# Altium PCB urbanturbine.PcbDoc
Units mil, origin at the board's own origin, x right, y up, seen from the top; angles counter-clockwise.
Board outline 2235 x 2080 mil, 2 copper layers (Top Layer, Bottom Layer); 33 components, 39 nets, 137 pads, 9 vias.
Unrouted connection lines stored in the file: 19.
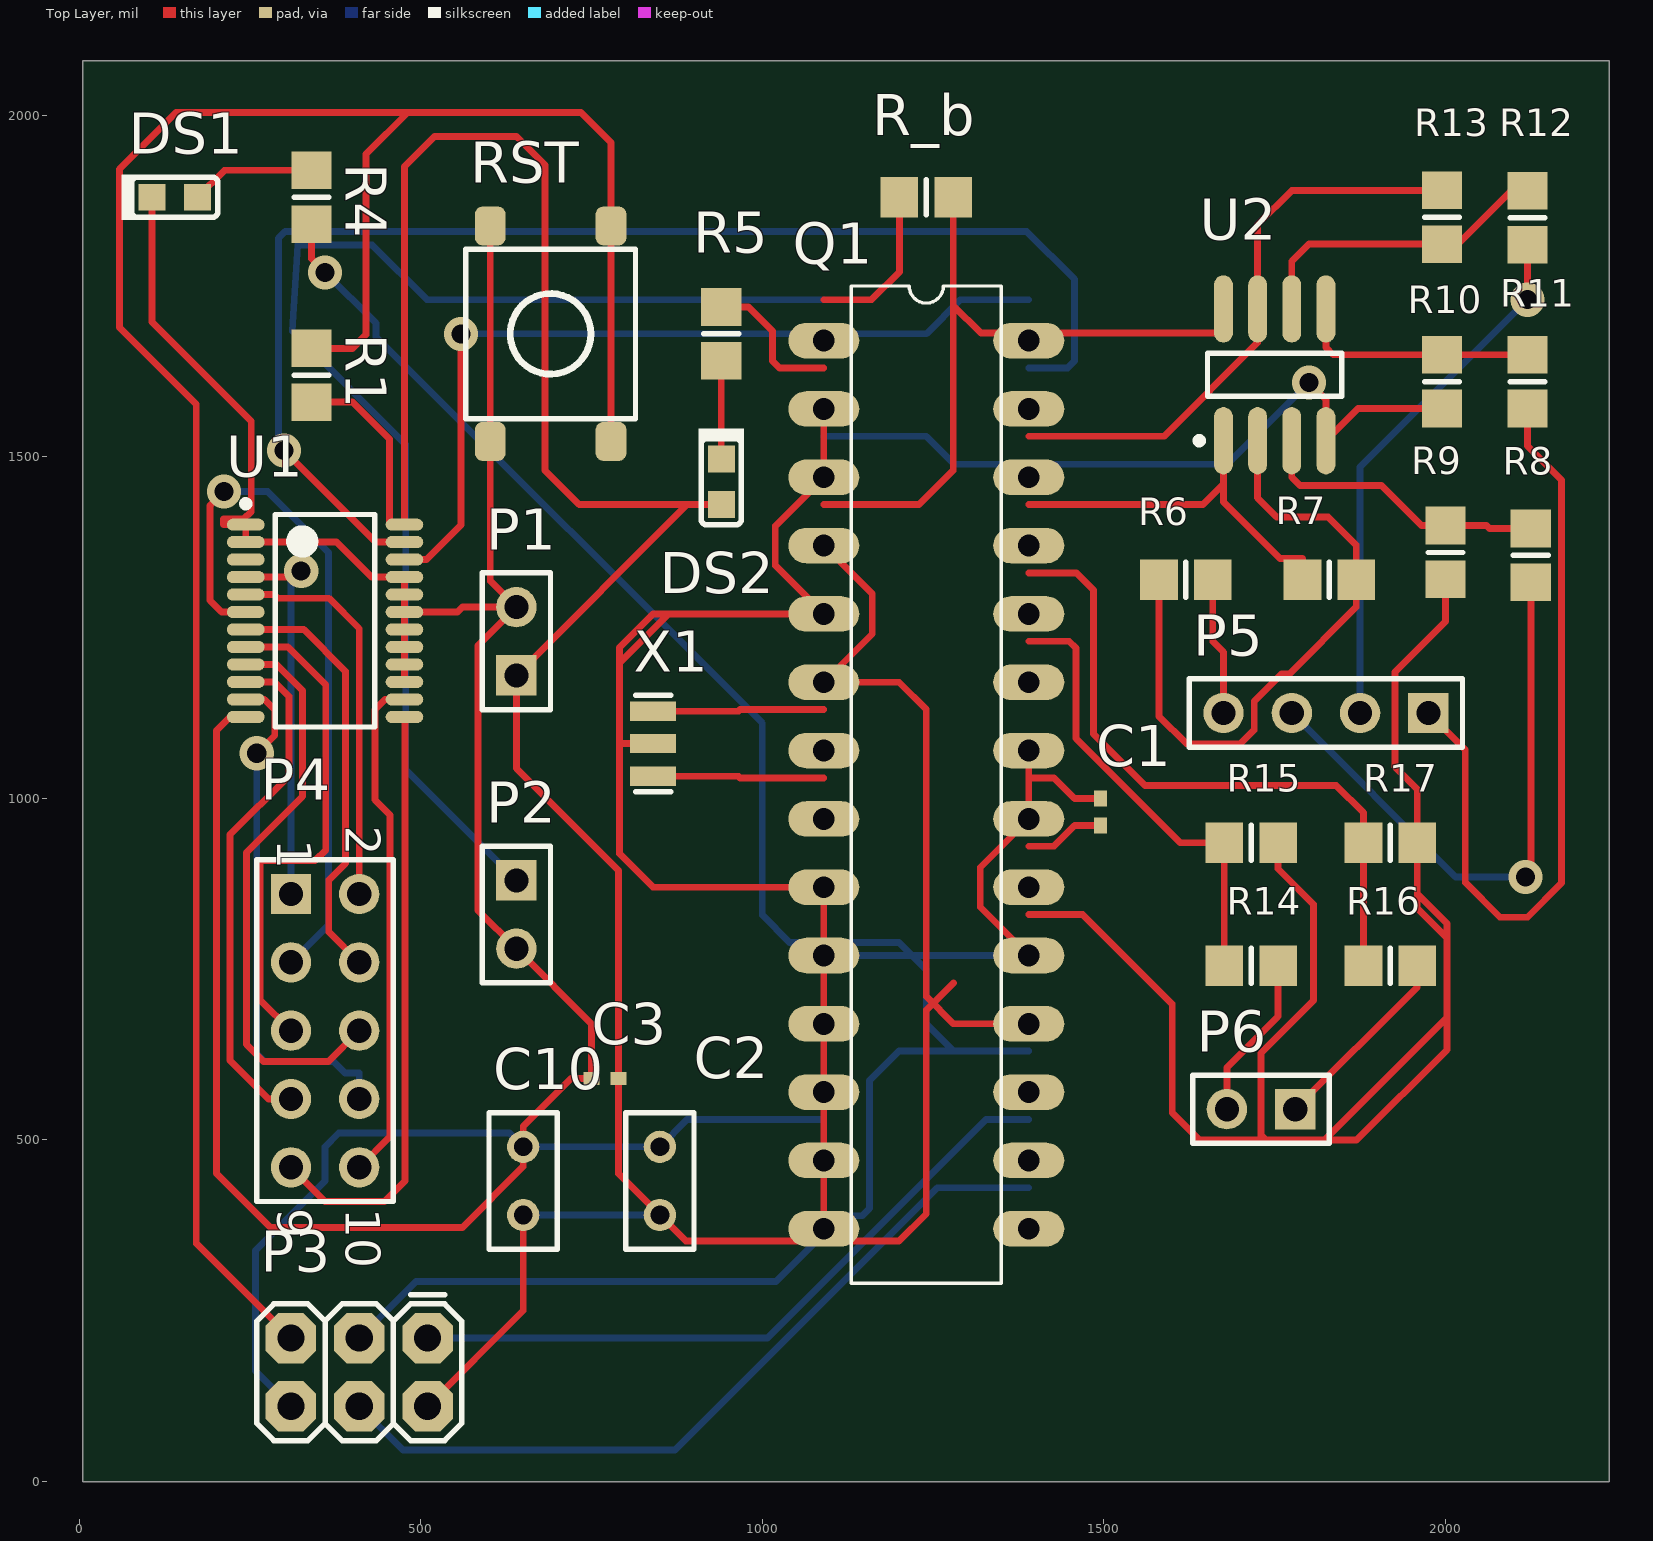
[diagram p0: Top Layer view]
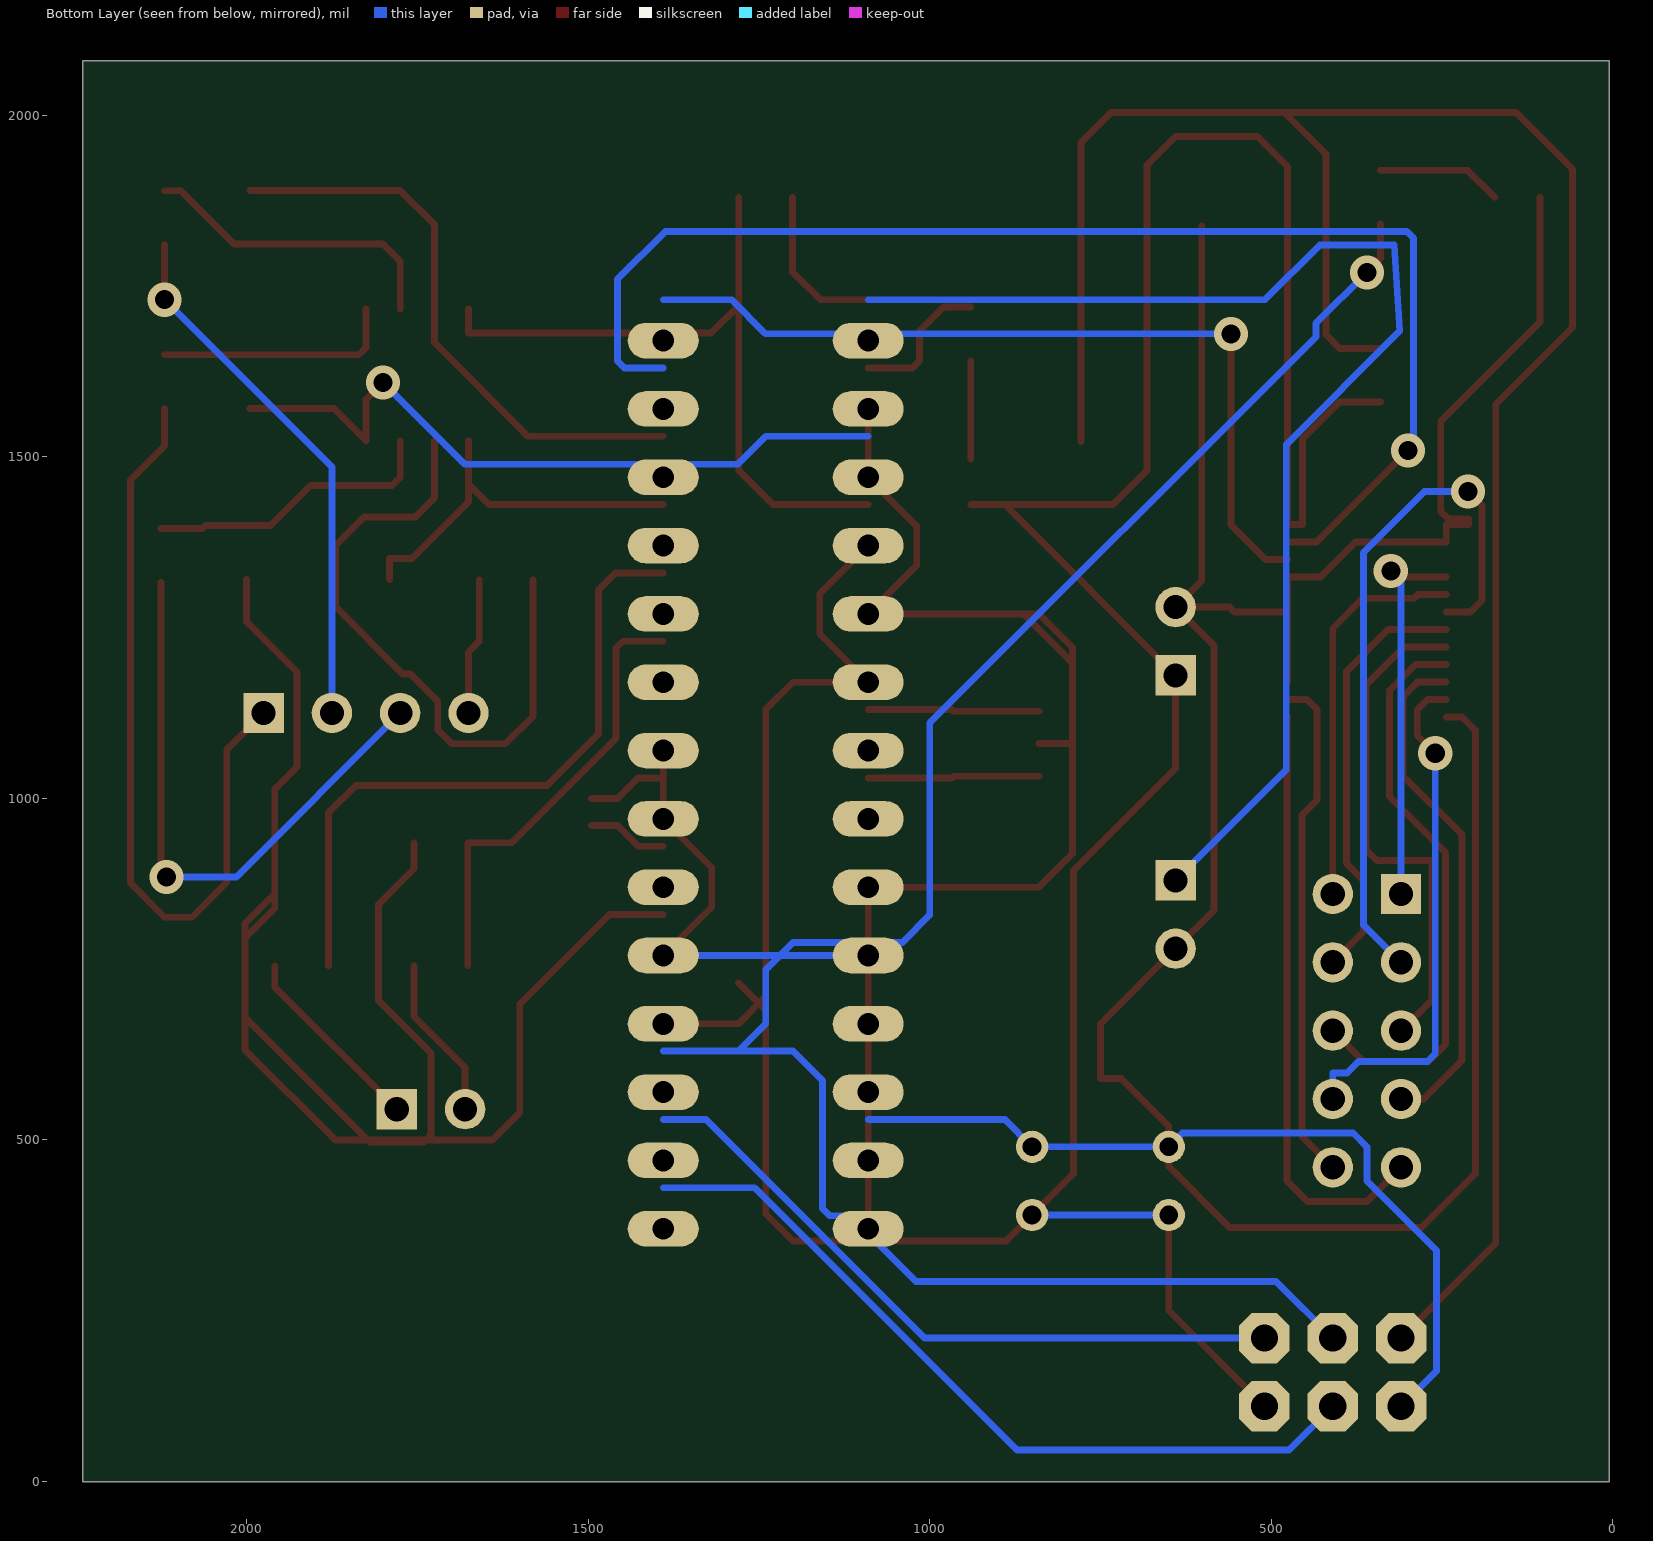
[diagram p1: Bottom Layer view, seen from below]

## Layer stack, top to bottom
Top Solder: solder mask 0.4, Solder Resist, Dk 3.5
Top Layer: signal copper 1.4
Dielectric 1: dielectric 12.6, FR-4, Dk 4.8
Bottom Layer: signal copper 1.4
Bottom Solder: solder mask 0.4, Solder Resist, Dk 3.5

## Board outline
5,0 5,1715 5,2080 2240,2080 2240,0

## Design rules (kind name [scope] priority, off if disabled: settings)
Clearance [All] p1: gap=10 ignorepadtopadclearanceinfootprint=FALSE except(0: Arc-Hole Track-Hole SMDPad-Hole THPad-Hole Via-Hole Fill-Hole Poly-Hole Region-Hole Text-Hole)
PolygonConnect [All] p1: connectstyle=Relief reliefconductorwidth=10 reliefentries=4 polygonreliefangle="90 Angle" airgapwidth=10
RoutingVias [All] p1: holewidth=28 width=50 viastyle="Through Hole" minholewidth=28 minwidth=50 maxholewidth=28 maxwidth=50
SolderMaskExpansion [All] p1: expansion=4
Width [All] p1: maxlimit=10 minlimit=10 preferedwidth=10
30 further rules are at their usual default settings.

## Classes and differential pairs
component class urbanturbine: C1 C2 C3 C10 DS1 DS2 P1 P2 P3 P4 Q1 R1 R4 R5 R_b RST U1 X1
component class sensors: P5 P6 R6 R7 R8 R9 R10 R11 R12 R13 R14 R15 R16 R17 U2

## Components (designator, comment, footprint, x,y, rotation, side; value= is the part's Value field where it differs from the comment)
C1 "C1005X7R1H104K050BB" 0402 1495,980 r270 top value=0.1uF
C2 "Cap Pol1" RAD-0.1 850,440 r90 top value=100pF
C3 "C1005X7R1H104K050BB" 0402 769.68,590 r0 top value=0.1uF
C10 "Cap Pol1" RAD-0.1 650,440 r90 top value=100pF
DS1 "LTST-C191KRKT" KING-LED0603-25-RED_V 140,1880 r0 top
DS2 "LTST-C191KGKT" KING-LED0603-25-GREEN_V 940,1463.46 r270 top
P1 "" HDR1X2 640,1180 r90 top
P2 "" HDR1X2 640,880 r270 top
P3 "M20-9980346" 2X3 510,210 r180 top
P4 "Header 5X2" HDR2X5 310,860 r270 top
P5 "" HDR1X4 1975,1125 r180 top
P6 "" HDR1X2 1780,545 r180 top
Q1 "ATMEGA328P-MU" *DIL28 1240,1020 r0 top
R1 "Res1" 6-0805_M 340,1619.37 r90 top value=1K
R4 "Res1" 6-0805_M 340,1880 r90 top value=1K
R5 "RC0603JR-071KL" 6-0805_M 940,1680 r90 top value=1k
R6 "10k" 6-0805_M 1620,1320 r0 top value="100k Ohm"
R7 "100k" 6-0805_M 1830,1320 r0 top value="100k Ohm"
R8 "10k" 6-0805_M 2125,1355.63 r270 top value="100k Ohm"
R9 "100k" 6-0805_M 2000,1360 r270 top value="100k Ohm"
R10 "100k" 6-0805_M 1995,1610 r90 top value="100k Ohm"
R11 "10k" 6-0805_M 2120,1610 r270 top value="100k Ohm"
R12 "10k" 6-0805_M 2120,1850 r90 top value="100k Ohm"
R13 "100k" 6-0805_M 1995,1850.63 r90 top value="100k Ohm"
R14 "90k" 6-0805_M 1715.63,755 r0 top value="10k Ohm"
R15 "10k" 6-0805_M 1715.63,935 r180 top value="22k Ohm"
R16 "90k" 6-0805_M 1919.37,755 r0 top value="10k Ohm"
R17 "10k" 6-0805_M 1919.37,935 r180 top value="22k Ohm"
R_b "Res1" 6-0805_M 1240,1880 r180 top value=1K
RST "PTS645SH50SMTR92 LFS" "TACTILE SWITCH SMD" 690,1680 r90 top
U1 "TCA9548A" TCA9548A 360,1260 r0 top
U2 "NCS2333" SO8_M 1750,1620 r90 top
X1 "16MHz" RESONATOR-SMD 840,1080 r270 top

## Footprints (in the part's own frame and the unit in brackets; to place one, negate y for a bottom-side part, rotate by r counter-clockwise, add the part's x,y. Pads: shape width x height; smd on the part's side, far side on the other; paste and mask are expansions set on the pad)
2X3 [mil] "2X3"
  oct 74x74 hole 40: 1(0,0) 2(0,100) 3(100,0) 4(100,100) 5(200,0) 6(200,100)
  silkscreen extent -50,-63 250,150, body extent -50,-49 250,149, height 335
6-0805_M [mm] "Chip Resistor, Body 2.0x1.2mm, IPC Low Density"
  rect 1.4x1.5 smd: 1(-1,0) 2(1,0)
  silkscreen extent 0,-0.65 0,0.65, body extent -1.07,-0.7 1.07,0.7, height 0.7
0402 [mm] "Chip Capacitor, Body 1.0x0.5mm, IPC High Density"
  rect 0.6x0.5 smd: 1(-0.5,0) 2(0.5,0)
  body extent -0.55,-0.3 0.55,0.3, height 1.3
*DIL28 [mil]
  oval 104x52 hole 32: 1(-150,650) 2(-150,550) 3(-150,450) 4(-150,350) 5(-150,250) 6(-150,150) 7(-150,50) 8(-150,-50) 9(-150,-150) 10(-150,-250) 11(-150,-350) 12(-150,-450) 13(-150,-550) 14(-150,-650) 15(150,-650) 16(150,-550) 17(150,-450) 18(150,-350) 19(150,-250) 20(150,-150) 21(150,-50) 22(150,50) 23(150,150) 24(150,250) 25(150,350) 26(150,450) 27(150,550) 28(150,650)
  silkscreen extent -110,-730 110,730, body extent -315,-730 110,730, height 314
HDR1X2 [mm] "Connector; Header; 2 Position"
  rect 1.5x1.5 hole 0.9: 1(0,0)
  round 1.5 hole 0.9: 2(2.54,0)
  silkscreen extent -1.27,-1.27 3.81,1.27
HDR1X4 [mm] "Connector; Header; 4 Position"
  rect 1.5x1.5 hole 0.9: 1(0,0)
  round 1.5 hole 0.9: 2(2.54,0) 3(5.08,0) 4(7.62,0)
  silkscreen extent -1.27,-1.27 8.89,1.27
HDR2X5 [mm] "Connector; Header; 5x2 Position"
  rect 1.5x1.5 hole 0.9: 1(0,0)
  round 1.5 hole 0.9: 2(0,2.54) 3(2.54,0) 4(2.54,2.54) 5(5.08,0) 6(5.08,2.54) 7(7.62,0) 8(7.62,2.54) 9(10.16,0) 10(10.16,2.54)
  silkscreen extent -1.27,-1.27 11.43,3.81
KING-LED0603-25-GREEN_V [mm] "LED, SMT, Body 1.6 x 0.8 mm, 0.25mm Thickness"
  rect 1x1 smd paste+0 mask+0: 1(0.85,0) 2(-0.85,0)
  silkscreen extent -1.97,-0.85 1.6,0.85, body extent -0.8,-0.4 0.8,0.4, height 0.25
KING-LED0603-25-RED_V [mm] "LED, SMT, Body 1.6 x 0.8 mm, 0.25mm Thickness"
  rect 1x1 smd paste+0 mask+0: 1(0.85,0) 2(-0.85,0)
  silkscreen extent -1.97,-0.85 1.6,0.85, body extent -0.8,-0.4 0.8,0.4, height 0.25
RAD-0.1 [mm] "Radial Cap, Thru-Hole; 2 Leads; 0.1 in Pin Spacing"
  round 1.2 hole 0.7: 1(-1.27,0) 2(1.27,0)
  silkscreen extent -2.54,-1.27 2.54,1.27
RESONATOR-SMD [mil] "RESONATOR-SMD"
  rect 28x67 smd: 1(-47.62,0) 2(-0.38,0) 3(47.62,0)
  silkscreen extent -71,-26 71,26
SO8_M [mm] "SOIC, 8-Leads, Body 4.9x3.9mm, Pitch 1.27mm, IPC Low Density"
  oval 2.5x0.7 smd: 1(-2.45,1.905) 2(-2.45,0.635) 3(-2.45,-0.635) 4(-2.45,-1.905) 5(2.45,-1.905) 6(2.45,-0.635) 7(2.45,0.635) 8(2.45,1.905)
  silkscreen extent -2.57,-2.5 0.8,2.93, body extent -2,-2.5 2,2.5, height 1.75
"TACTILE SWITCH SMD" [mil] "Switch, Through-Hole, 4 Leads, Body 8.5x8.5mm, Row Spacing 9.0mm, Pitch 4.5mm"
  rrect50% 57x45 smd: 1(157.87,-88.58) 2(-157.48,-88.58) 3(157.87,88.19) 4(-157.48,88.19)
  silkscreen extent -124,-124 124,124, body extent -177,-122 177,122, height 177
TCA9548A [mm] "TSOP, 24-Leads, Body 7.80x4.40mm, Pitch 0.65mm, IPC Medium Density"
  oval 1.4x0.45 smd: 1(-2.95,3.575) 2(-2.95,2.925) 3(-2.95,2.275) 4(-2.95,1.625) 5(-2.95,0.975) 6(-2.95,0.325) 7(-2.95,-0.325) 8(-2.95,-0.975) 9(-2.95,-1.625) 10(-2.95,-2.275) 11(-2.95,-2.925) 12(-2.95,-3.575) 13(2.95,-3.575) 14(2.95,-2.925) 15(2.95,-2.275) 16(2.95,-1.625) 17(2.95,-0.975) 18(2.95,-0.325) 19(2.95,0.325) 20(2.95,0.975) 21(2.95,1.625) 22(2.95,2.275) 23(2.95,2.925) 24(2.95,3.575)
  silkscreen extent -3.07,-3.95 1.85,4.47, body extent -3.27,-3.96 3.28,3.93, height 1.2

## Part data
C1 C3: "CAP CER 0.1UF 50V 10% X7R 0402", Capacitance=0.1µF, Manufacturer="TDK Corporation", Operating Temperature="-55°C ~ 125°C", Package / Case="0402 (1005 Metric)", Ratings=-, Supplier Part Number 1=445-5932-1-ND, Temperature Coefficient=X7R, Tolerance=±10%, Voltage - Rated=50V, Applications="General Purpose", Category=Capacitors, ComponentLink1Description=http://product.tdk.com/en/catalog/datasheets/mlcc_commercial_general_en.pdf, ComponentLink1URL=http://product.tdk.com/en/catalog/datasheets/mlcc_commercial_general_en.pdf, Features=-, Height - Seated (Max)=-, Lead Spacing=-, Lead Style=-, Manufacturer Part Number=C1005X7R1H104K050BB, Mounting Type="Surface Mount, MLCC", Packaging="Cut Tape (CT)", Pricing 1="1=0.21, 10=0.14, 100=0.0664, 250=0.05592, 500=0.04684, 1000=0.03845, 5000=0.03251 (CAD)", RoHS="RoHS Compliant", Size / Dimension="0.039\" L x 0.020\" W (1.00mm x 0.50mm)", Stock 1=7100869, Supplier 1=Digi-Key, Thickness (Max)="0.022\" (0.55mm)"
C2 C10: "Polarized Capacitor (Radial)", LatestRevisionDate=17-Jul-2002, LatestRevisionNote="Re-released for DXP Platform.", PackageDescription="Polarized Capacitor (Radial); 2 Leads", PackageReference=RB7.6-15, Published=8-Jun-2000, Publisher="Altium Limited"
DS1: "LED SUPER RED CLR THIN 0603 SMD", Color=Red, Current - Test=20mA, Lens Color=Colorless, Manufacturer="Lite-On Inc.", Millicandela Rating=54mcd, Package / Case="0603 (1608 Metric)", Supplier Part Number 1=160-1447-1-ND, Voltage - Forward (Vf) (Typ)=2V, Category=Optoelectronics, ComponentLink1Description=http://optoelectronics.liteon.com/upload/download/DS22-2000-223/S_110_LTST-C191KRKT.pdf, ComponentLink1URL=http://optoelectronics.liteon.com/upload/download/DS22-2000-223/S_110_LTST-C191KRKT.pdf, Height (Max)=0.55mm, Lens Style/Size="Rectangle with Flat Top, 1.10mm x 0.80mm", Lens Transparency=Clear, Manufacturer Part Number=LTST-C191KRKT, Mounting Type="Surface Mount", Packaging="Cut Tape (CT)", Pricing 1="1=0.42, 10=0.333, 100=0.1812, 250=0.1208, 500=0.10268, 1000=0.07853, 2500=0.07098 (CAD)", RoHS="RoHS Compliant", Size / Dimension="1.60mm L x 0.80mm W", Stock 1=239192, Supplier 1=Digi-Key, Viewing Angle=130°, Wavelength - Dominant=631nm, Wavelength - Peak=639nm
DS2: "LED GREEN CLEAR THIN 0603 SMD", Color=Green, Current - Test=20mA, Lens Color=Colorless, Manufacturer="Lite-On Inc.", Millicandela Rating=35mcd, Package / Case="0603 (1608 Metric)", Supplier Part Number 1=160-1446-6-ND, Voltage - Forward (Vf) (Typ)=2V, Category=Optoelectronics, ComponentLink1Description=http://optoelectronics.liteon.com/upload/download/DS22-2000-228/S_110_LTST-C191KGKT.pdf, ComponentLink1URL=http://optoelectronics.liteon.com/upload/download/DS22-2000-228/S_110_LTST-C191KGKT.pdf, Height (Max)=0.55mm, Lens Style/Size="Rectangle with Flat Top, 1.10mm x 0.80mm", Lens Transparency=Clear, Manufacturer Part Number=LTST-C191KGKT, Mounting Type="Surface Mount", Packaging=Digi-Reel®, Pricing 1="1=0.42, 10=0.333, 100=0.1812, 250=0.1208, 500=0.10268, 1000=0.07853, 2500=0.07098 (CAD)", RoHS="RoHS Compliant", Size / Dimension="1.60mm L x 0.80mm W", Stock 1=186242, Supplier 1=Digi-Key, Viewing Angle=130°, Wavelength - Dominant=571nm, Wavelength - Peak=574nm
P1 P2 P6: library part "Header 2", "Header, 2-Pin", LatestRevisionDate=17-Jul-2002, LatestRevisionNote="Re-released for DXP Platform.", Publisher="Altium Limited"
P3: "DIL VERTICAL PC TAIL PIN HEADER", Color=Black, Manufacturer="Harwin Inc.", Supplier Part Number 1=952-2121-ND, Category="Connectors, Interconnects", ComponentLink1Description=http://cdn.harwin.com/pdfs/M20-998.pdf, ComponentLink1URL=http://cdn.harwin.com/pdfs/M20-998.pdf, Connector Type="Header, Unshrouded, Breakaway", Contact Finish=Tin, Contact Finish Thickness=-, Contact Mating Length="0.240\" (6.10mm)", Contact Type="Male Pin", Fastening Type=-, Features=-, Manufacturer Part Number=M20-9980346, Mounting Type="Through Hole", Number of Positions=6, Number of Positions Loaded=All, Number of Rows=2, Packaging=Bulk, Pitch="0.100\" (2.54mm)", Pricing 1="1=0.32, 10=0.299, 25=0.2552, 50=0.2232, 100=0.2072, 250=0.18336, 500=0.17534, 1000=0.14346, 2500=0.13151 (CAD)", RoHS="RoHS Compliant", Row Spacing="0.100\" (2.54mm)", Stock 1=14297, Supplier 1=Digi-Key, Termination=Solder
P4: "Header, 5-Pin, Dual row", LatestRevisionDate=17-Jul-2002, LatestRevisionNote="Re-released for DXP Platform.", Publisher="Altium Limited"
P5: library part "Header 4", "Header, 4-Pin", LatestRevisionDate=17-Jul-2002, LatestRevisionNote="Re-released for DXP Platform.", Publisher="Altium Limited"
Q1: "IC MCU 8BIT 32KB FLASH 32QFN", Manufacturer=Atmel, Operating Temperature="-40°C ~ 85°C", Package / Case="32-VFQFN Exposed Pad", Supplier Device Package="32-VQFN (5x5)", Supplier Part Number 1=ATMEGA328P-MU-ND, Voltage - Supply (Vcc/Vdd)="1.8 V ~ 5.5 V", Category="Integrated Circuits (ICs)", ComponentLink1Description=http://www.atmel.com/images/atmel-8271-8-bit-avr-microcontroller-atmega48a-48pa-88a-88pa-168a-168pa-328-328p_datasheet_summary.pdf, ComponentLink1URL=http://www.atmel.com/images/atmel-8271-8-bit-avr-microcontroller-atmega48a-48pa-88a-88pa-168a-168pa-328-328p_datasheet_summary.pdf, Connectivity="I²C, SPI, UART/USART", Core Processor=AVR, Core Size=8-Bit, Data Converters="A/D 8x10b", EEPROM Size="1K x 8", Manufacturer Part Number=ATMEGA328P-MU, Number of I/O=23, Oscillator Type=Internal, Packaging=Tray, Peripherals="Brown-out Detect/Reset, POR, PWM, WDT", Pricing 1="1=5.01, 10=4.465, 100=3.6608, 250=3.30364, 500=2.96432, 1000=2.50003 (CAD)", Program Memory Size="32KB (16K x 16)", Program Memory Type=FLASH, RAM Size="2K x 8", RoHS="RoHS Compliant", Speed=20MHz, Stock 1=70195, Supplier 1=Digi-Key
R1 R4 R_b: "Resistor", LatestRevisionDate=17-Jul-2002, LatestRevisionNote="Re-released for DXP Platform.", PackageDescription="Axial Device, Thru-Hole; 2 Leads; 0.3 in Pin Spacing", PackageReference=AXIAL-0.3, Published=8-Jun-2000, Publisher="Altium Limited"
R5: "RES SMD 1K OHM 5% 1/10W 0603", Manufacturer=Yageo, Operating Temperature="-55°C ~ 155°C", Package / Case="0603 (1608 Metric)", Power (Watts)="0.1W, 1/10W", Resistance (Ohms)=1k, Supplier Device Package=0603, Supplier Part Number 1=311-1.0KGRCT-ND, Temperature Coefficient=±100ppm/°C, Tolerance=±5%, Category=Resistors, ComponentLink1Description=http://www.yageo.com/NewPortal/yageodocoutput?fileName=/pdf/R-Chip/PYu-RC_Group_51_RoHS_L_3.pdf, ComponentLink1URL=http://www.yageo.com/NewPortal/yageodocoutput?fileName=/pdf/R-Chip/PYu-RC_Group_51_RoHS_L_3.pdf, Composition="Thick Film", Features="Moisture Resistant", Height="0.022\" (0.55mm)", Manufacturer Part Number=RC0603JR-071KL, Number of Terminations=2, Packaging="Cut Tape (CT)", Pricing 1="1=0.15, 10=0.016, 25=0.012, 100=0.0066, 250=0.005, 500=0.00402, 1000=0.00295, 2500=0.00256 (CAD)", RoHS="RoHS Compliant", Size / Dimension="0.063\" L x 0.031\" W (1.60mm x 0.80mm)", Stock 1=1746734, Supplier 1=Digi-Key
R6 R7 R8 R9 R10 R11 R12 R13: library part 100k-125mW-0805-1%, "Resistor, 100k, 125mW Power Rating, 0805 Package", ManufacturerReference=MCR10EZPF1003, PowerRating=125mWatt, Category=Resistor, DistributorName=Digikey, DistributorReference=RHM100KCRCT-ND, InventoryNumber=RES052, Other=1%, PackageReference=0805
R14 R16: library part 10k-125mW-0805-1%, "Resistor, 10k, 125mW Power Rating, 0805 Package", ManufacturerReference=MCR10EZPF1002, PowerRating=125mWatt, Category=Resistor, DistributorName=Digikey, DistributorReference=RHM10.0KCRCT-ND, InventoryNumber=RES038, Other=1%, PackageReference=0805
R15 R17: library part 22k-125mW-0805-1%, "Resistor, 22k, 125mW Power Rating, 0805 Package", ManufacturerReference=RMCF0805FT22K0, PowerRating=125mWatt, Category=Resistor, DistributorName=Digikey, DistributorReference=RMCF0805FT22K0CT-ND, InventoryNumber=RES044, Other=1%, PackageReference=0805
RST: "SWITCH TACTILE SPST-NO 0.05A 12V", Contact Rating @ Voltage="0.05A @ 12VDC", Illumination Type, Color=-, Manufacturer="C&K Components", Operating Force=200gf, Operating Temperature="-20°C ~ 60°C", Supplier Part Number 1=CKN9085CT-ND, Actuator Height off PCB, from Pins=5.00mm, Actuator Material="Polyamide (PA66), Nylon 6/6", Actuator Orientation="Top Actuated", Actuator Type=Standard, Category=Switches, Circuit=SPST-NO, ComponentLink1Description=http://www.ck-components.com/14409/pts645_25apr13.pdf/, ComponentLink1URL=http://www.ck-components.com/14409/pts645_25apr13.pdf/, Features=-, Illumination=Non-Illuminated, Illumination Voltage (Nominal)=-, Ingress Protection=-, Manufacturer Part Number="PTS645SH50SMTR92 LFS", Mechanical Life="100,000 Cycles", Mounting Type="Surface Mount", Outline="6.00mm x 6.00mm", Packaging="Cut Tape (CT)", Pricing 1="1=0.43, 10=0.418, 25=0.404, 50=0.3892, 100=0.3675, 250=0.34592, 500=0.3315 (CAD)", RoHS="RoHS Compliant", Stock 1=49163, Supplier 1=Digi-Key, Switch Function=Off-Mom, Switch Travel=-, Termination Style="Gull Wing"
U1: "IIC multiplexor"
U2: "IC dual op-amp"
X1: library part CSTNE16M0VH3C000R0, "CER RESONATOR 16MHZ SMD", Capacitance=33pF, Frequency=10MHz, Frequency Stability=±0.2%, Frequency Tolerance=±0.5%, Manufacturer="Murata Electronics North America", Manufacturer Part Number=CSTCE10M0G55Z-R0, Operating Temperature="-40°C ~ 125°C", Package / Case="3-SMD, Non-Standard", Supplier Part Number 1=490-4715-1-ND, Category="Crystals and Oscillators", ComponentLink1Description=http://www.murata.com/~/media/webrenewal/support/library/catalog/products/timingdevice/ceralock/p16e.ashx, ComponentLink1URL=http://www.murata.com/~/media/webrenewal/support/library/catalog/products/timingdevice/ceralock/p16e.ashx, Features="Built in Capacitor", Height="0.031\" (0.80mm)", Impedance=-, Mounting Type="Surface Mount", Packaging="Cut Tape (CT)", Pricing 1="1=0.69, 10=0.573, 50=0.5166, 100=0.4596, 500=0.43548, 1000=0.36763 (CAD)", RoHS="RoHS Compliant", Size / Dimension="0.126\" L x 0.051\" W (3.20mm x 1.30mm)", Stock 1=14995, Supplier 1=Digi-Key, Type=Ceramic

## Via types
v1: diameter 50, hole 28, Top Layer to Bottom Layer, 9 vias

## Nets (pads, with @x,y where several pads share a name; then routed paths per layer and width w, separated by ;. In a path a pad name is that pad's centre, name@x,y a point inside that pad or via, vN(x,y) a via of type N, cw(c..) or ccw(c..) an arc to the next point about the centre after c; other vN are vias at no path point)
+5: C2.1 C3.2 C10.1 DS2.1 P1.1 P3.2 Q1.4 Q1.6 Q1.18 R1.1 R_b.1 U1.24 U2.8 | length 6390.6
  Top Layer w10: R1.1 400,1580 454.18,1525.82 454.18,1400.75 U1.24@476,1400.75 ; U1.24 U1.24@476,1400.75 ; P3.2 650,250 C10.1 ; DS2.1 890,1430 ; Q1.4 1161,1299 1161,1241 Q1.6 1200,1170 1240,1130 1240,710 1280,670 Q1.18 ; 1090,1430 1229.37,1430 1279.37,1480 1279.37,1721.63 ; R_b.1 1279.37,1721.63 ; 1280,730 1240,690 1240,392 1200,352 888,352 C2.1 789.37,450.63 C3.2 789.37,894.63 640,1044 P1.1 890,1430 ; U2.8 1675,1681 1320,1681 1279.37,1721.63 ; U1.24@476,1400.75 476,1925 520,1969 640,1969 682,1927 682,1480 732,1430 890,1430
  Bottom Layer w10: C10.1 C2.1
BTN_+: P2.1 Q1.1 R_b.2 | length 2106.1
  Top Layer w10: 1090,1730 1160,1730 1200.63,1770.63 R_b.2
  Bottom Layer w10: P2.1 478,1042 478,1518 312,1684 320,1810 429,1810 509,1730 1090,1730
CRANK_CURRENT: Q1.25 R7.1 U2.1 | length 568
  Top Layer w10: 1390,1430 1645,1430 1675,1460 ; U2.1 1675,1460 ; R7.1 1790.63,1351 1758,1351 1675,1434 1675,1460
CRANK_IN_+: P6.2 R14.2 | length 241.1
  Top Layer w10: P6.2 1680,606 1755,681 R14.2
CRANK_SHUNT_+: P5.3 R8.2 | length 876
  Top Layer w10: v1(2117,885) 2125,893 R8.2
  Bottom Layer w10: P5.3 2015,885 v1(2117,885)
CRANK_SHUNT_-: P5.4 R6.2 | length 201.5
  Top Layer w10: R6.2 1659.37,1229.63 1675,1214 P5.4
CRANK_VOLTAGE: Q1.23 R14.1 R15.2 | length 665.8
  Top Layer w10: 1390,1230 1449,1230 1459,1220 1459,1088 1612,935 R15.2 R14.1
GND: C1.1 C2.2 C3.1 C10.2 DS1.2 P1.2 P2.2 P3.6 Q1.2 Q1.3 Q1.5 Q1.9 Q1.10 Q1.11 Q1.12 Q1.13 Q1.14 Q1.19 Q1.21 Q1.22 R5.2 R9.2 R10.1 R15.1 R17.1 RST.3 RST.4 U1.1 U1.2 U1.12 U1.15 U1.16 U1.17 U1.18 U1.19 U1.20 U1.21 U2.4 X1.2 | length 11738.1
  Top Layer w10: DS1.2 106.53,1697.47 252,1552 252,1420 240.83,1408.83 211.5,1408.83 211.5,1400.75 U1.1 U1.2 376.82,1375.16 428,1323.98 U1.21 U1.20 U1.19 ; U1.12 221,1119.25 201,1099.25 201,451 280,372 561,372 650,461 C10.2 650,520 720,590 C3.1 750,670 P2.2 584,836 584,1224 P1.2 ; U1.15 U1.16 U1.17 U1.18 U1.19 ; RST.3 RST.4 601.81,1318.19 P1.2 ; 791,1080.38 X1.2 ; R5.2 980,1719.37 1015,1684.37 1015,1640 1025,1630 1090,1630 ; Q1.14 Q1.13 Q1.12 Q1.11 Q1.10 Q1.9 840,870 791,919 791,1020.38 791,1198 ; Q1.2 Q1.3 1019,1399 1019,1341 Q1.5 863,1270 ; Q1.19 1319,841 1319,899 Q1.21 Q1.22 ; 1390,830 1469,830 1600,699 1600,540 1640,500 1737,500 ; 1390,1030 1427,1030 1457.31,999.69 C1.1 ; R15.1 1755,897 1807,845 1807,704 1730,627 1730,507 1737,500 ; v1(1800,1609) 1825,1584 U2.4 1872.09,1570.63 R10.1 ; R9.2 2000,1259 1926,1185 1926,1045.74 1958.74,1013 R17.1 1958.74,860.26 ; U1.19 554,1272.8 561.2,1280 P1.2 ; 791,1198 791,1221 840,1270 863,1270 ; 791,1198 863,1270 ; 1737,500 1740,497 1820,497 1823,500 ; 1737,500 1823,500 ; 1823,500 2002,679 ; 1823,500 1870,500 2002,632 2002,679 ; 1958.74,860.26 1958.74,839 2002,795.74 ; 1958.74,860.26 2002,817 2002,795.74 ; 2002,679 2002,795.74
  Bottom Layer w10: P3.6 258,162 258,338 360,440 360,490 380,510 630,510 C10.2 C2.2 890,530 1090,530 ; Q1.10 Q1.19 ; 1090,1530 1240,1530 1281,1489 1680,1489 v1(1800,1609)
MISO: P3.1 Q1.16 | length 1012.5
  Bottom Layer w10: P3.1 1007.49,210 1327.49,530 1390,530
MOSI: P3.4 Q1.15 | length 1165.6
  Bottom Layer w10: P3.4 474,46 872,46 1256,430 1390,430
MUX_RST: U1.3
NetC1_2: C1.2 Q1.20 | length 117.6
  Top Layer w10: 1390,930 1427,930 1457.31,960.31 C1.2
NetDS1_1: DS1.1 R4.2 | length 182.8
  Top Layer w10: DS1.1 212.83,1919.37 R4.2
NetDS2_2: DS2.2 R5.1 | length 143.7
  Top Layer w10: DS2.2 R5.1
NetQ1_7: Q1.7 X1.1 | length 251
  Top Layer w10: X1.1 965,1127.62 967.38,1130 1090,1130
NetQ1_8: Q1.8 X1.3 | length 251
  Top Layer w10: X1.3 965,1032.38 967.38,1030 1090,1030
NetR6_1: R6.1 R7.2 U2.2 | length 960.2
  Top Layer w10: R6.1 1580.63,1120 1620.63,1080 1700,1080 1720,1100 1720,1142 1760,1182 1771.37,1182 1869.37,1280 R7.2 1869.37,1371 1828.37,1412 1753,1412 1725,1440 U2.2
NetR8_1: R8.1 R9.1 U2.3 | length 434.6
  Top Layer w10: U2.3 1775,1470 1787,1458 1906.37,1458 1965,1399.37 R9.1 2060,1399.37 2064.37,1395 R8.1
NetR10_2: R10.2 R11.1 U2.5 | length 355.9
  Top Layer w10: U2.5 1825,1660 1835.63,1649.37 R10.2 R11.1
NetR12_2: R12.2 R13.1 U2.6 | length 457.5
  Top Layer w10: U2.6 1775,1786.26 1800,1811.26 R13.1 2018,1811.26 2096.11,1889.37 R12.2
RST: P3.5 R1.2 RST.1 RST.2 | length 3463.4
  Top Layer w10: P3.5 171.5,348.5 171.5,1576.79 59,1689.29 59,1921 142,2004 481,2004 ; R1.2 400,1658.74 420,1678.74 420,1943 481,2004 ; RST.2 778.58,1680 RST.1 778.58,1960 734.58,2004 481,2004
SC0: P4.2 U1.5 | length 575.2
  Top Layer w10: U1.5 285,1298.39 290.39,1293 365.39,1293 410,1248.39 P4.2
SC1: P4.4 U1.7 | length 626.1
  Top Layer w10: U1.7 328.8,1247.2 390,1186 390,905 365.47,880.47 365.47,804.53 P4.4
SC2: P4.6 U1.9 | length 844.7
  Top Layer w10: U1.9 288.7,1196.02 327,1157.72 327,1003 245,921 245,640 270,615 365,615 P4.6
SC3: P4.8 U1.11 | length 762.9
  Top Layer w10: U1.11 271,1144.84 286.42,1129.42 286.42,1092.42 v1(260,1066)
  Bottom Layer w10: v1(260,1066) 260,626 271,615 372,615 389,598 410,598 P4.8
SC4: P4.10 U1.14 | length 747
  Top Layer w10: P4.10 455,505 455,975.91 433,997.91 433,1130 447.84,1144.84 U1.14
SCK: P3.3 Q1.17 R4.1 | length 2957.2
  Top Layer w10: R4.1 340,1790 v1(360,1770)
  Bottom Layer w10: v1(360,1770) 434.49,1695.51 434.49,1675.51 1000,1110 1000,829 1040,789 1200,789 1240,749 1240,670 1280,630 ; P3.3 493,293 1020,293 1116,389 1146,389 1157,400 1157,587 1200,630 1280,630 ; 1390,630 1280,630
SCL: Q1.28 U1.22 | length 1235.5
  Top Layer w10: U1.22 508.57,1349.57 559,1400 v1(559,1680)
  Bottom Layer w10: v1(559,1680) 1240,1680 1290,1730 1390,1730
SD0: P4.1 U1.4 | length 564.1
  Top Layer w10: U1.4 315.98,1323.98 v1(325,1333)
  Bottom Layer w10: P4.1 310,1318 v1(325,1333)
SD1: P4.3 U1.6 | length 1039.6
  Top Layer w10: v1(212,1449) 191.5,1428.5 191.5,1290 208.7,1272.8 U1.6
  Bottom Layer w10: v1(212,1449) 276,1449 365,1360 365,815 P4.3
SD2: P4.5 U1.8 | length 751.7
  Top Layer w10: U1.8 305.39,1221.61 361,1166 361,924.53 345.47,909 265,909 265,705 P4.5
SD3: P4.7 U1.10 | length 753
  Top Layer w10: U1.10 286,1170.43 307,1149.43 307,1033 221,947 221,616.19 277.19,560 P4.7
SD4: P4.9 U1.13 | length 880.2
  Top Layer w10: P4.9 360,410 447,410 477,440 477,1119.25 U1.13
SDA: Q1.27 U1.23 | length 1935.7
  Top Layer w10: v1(300,1509.16) 434,1375.16 U1.23
  Bottom Layer w10: v1(300,1509.16) 291.58,1517.57 291.58,1820 301.58,1830 1387,1830 1457,1760 1457,1640 1447,1630 1390,1630
TURBINE_CURRENT: Q1.26 R13.2 U2.7 | length 855.5
  Top Layer w10: 1390,1530 1588,1530 1725,1667 U2.7 1725,1840 1775,1890 R13.2
TURBINE_IN_+: P6.1 R16.2 | length 284
  Top Layer w10: P6.1 1958.74,723.74 R16.2
TURBINE_SHUNT_+: P5.1 R11.2 | length 1168.5
  Top Layer w10: P5.1 2029,1071 2029,877 2080,826 2120,826 2170,876 2170,1466 2120,1516 R11.2
TURBINE_SHUNT_-: P5.2 R12.1 | length 787.1
  Top Layer w10: v1(2120,1730) R12.1
  Bottom Layer w10: P5.2 1875,1485 v1(2120,1730)
TURBINE_VOLTAGE: Q1.24 R16.1 R17.2 | length 983
  Top Layer w10: 1390,1330 1460,1330 1485,1305 1485,1094 1560,1019 1840,1019 1880,979 R17.2 R16.1

## Silkscreen, mask and mechanical layers (free items; w line width, h text height)
Mechanical 1:
  the board outline again, w10

## Text inside footprints (layer, text, board x,y; h text height)
P4: Top Overlay "10" at 390,400 h50 r270; Top Overlay "9" at 290,400 h50 r270; Top Overlay "1" at 290,940 h50 r270; Top Overlay "2" at 390,960 h50 r270